# Altium PCB Tag.PcbDoc
Units mm, origin at the board's own origin, x right, y up, seen from the top; angles counter-clockwise.
Board outline 50 x 40 mm, 4 copper layers (Top Layer, Inner Layer L2, Inner Layer L3, Bottom Layer), stack 1.586 mm thick; 65 components, 39 nets, 267 pads, 139 vias.
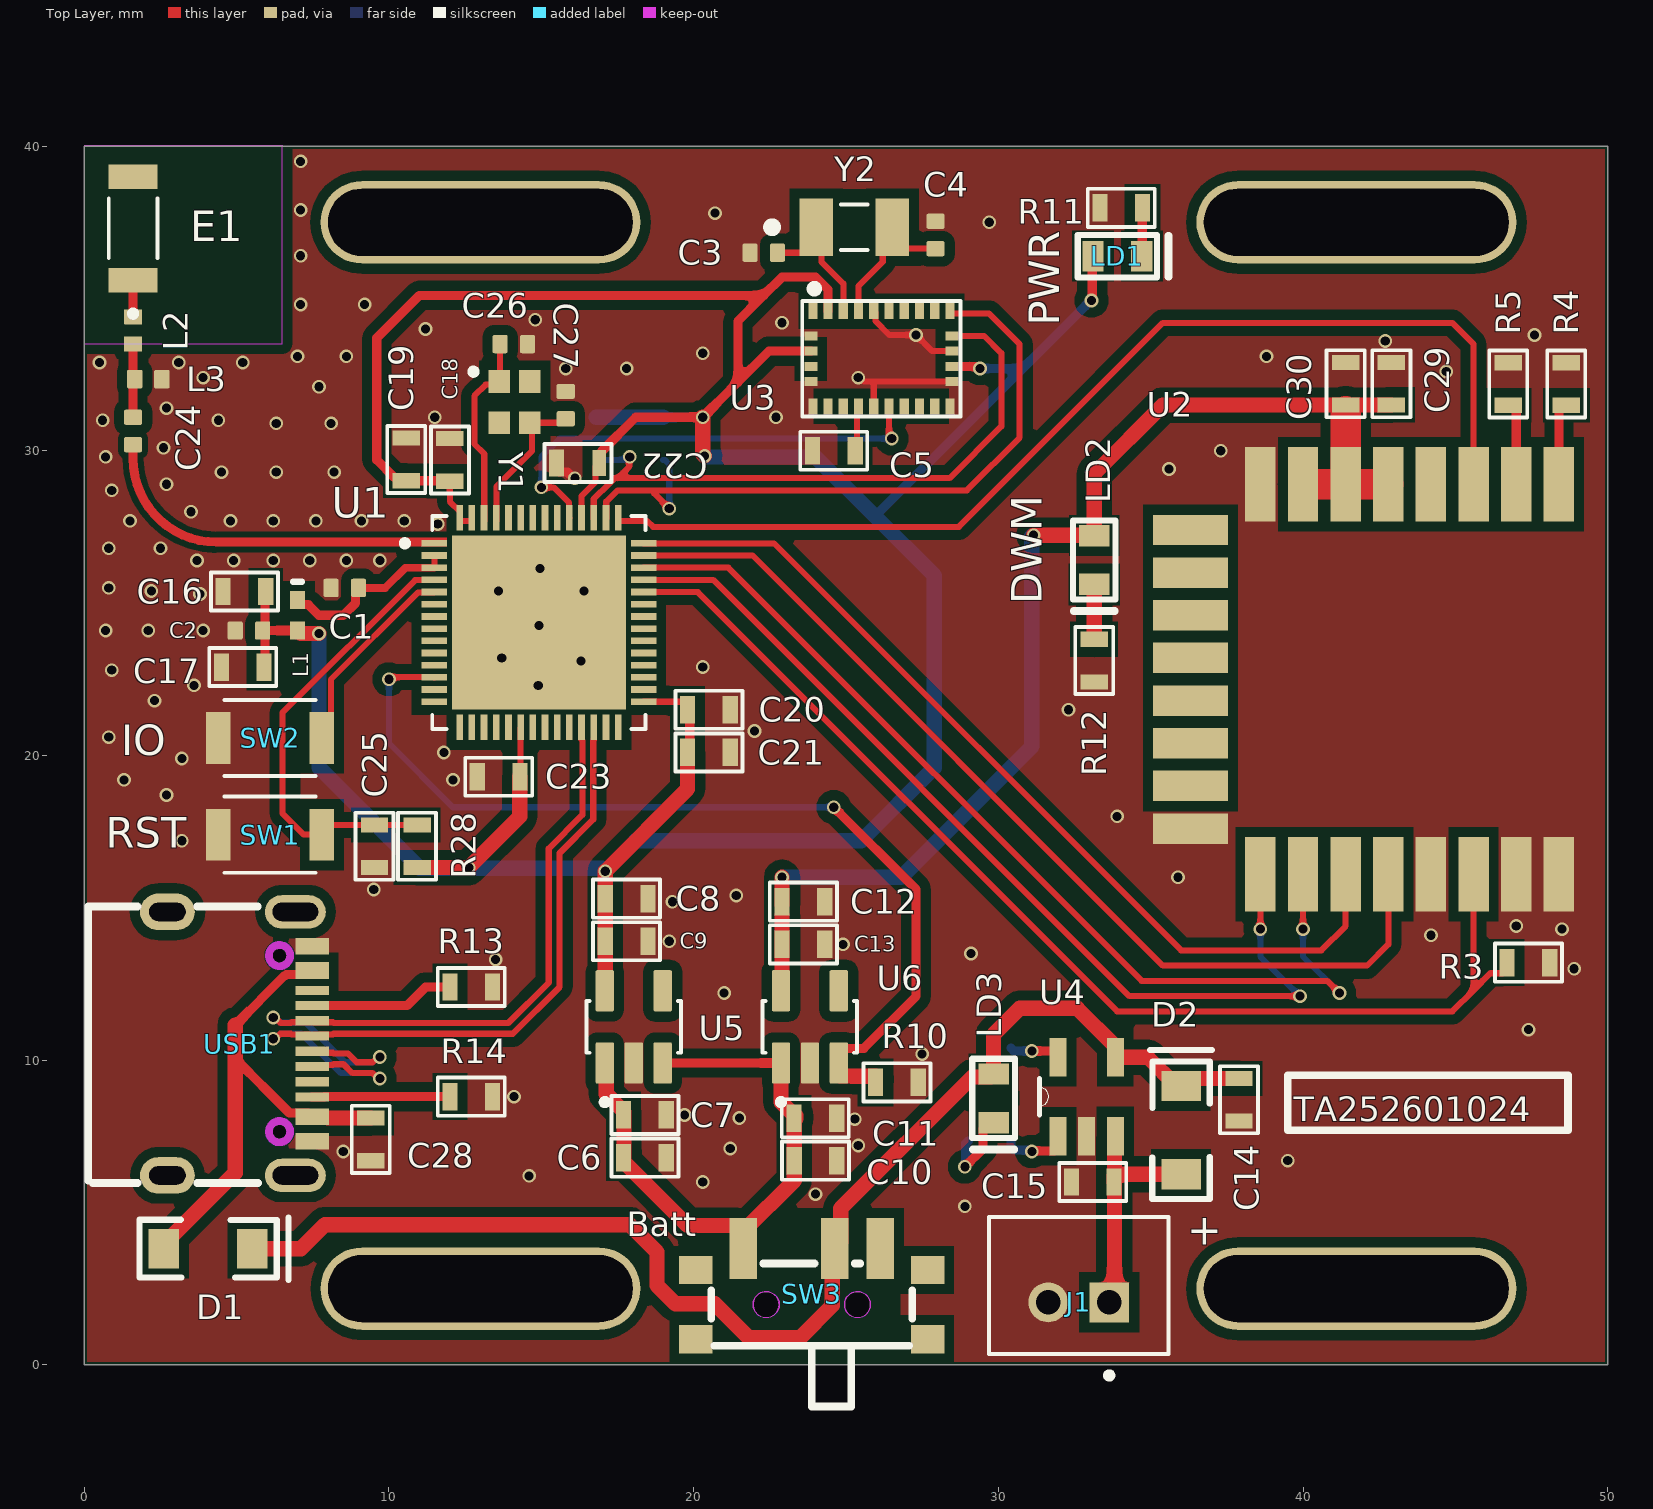
[diagram p0: Top Layer view]
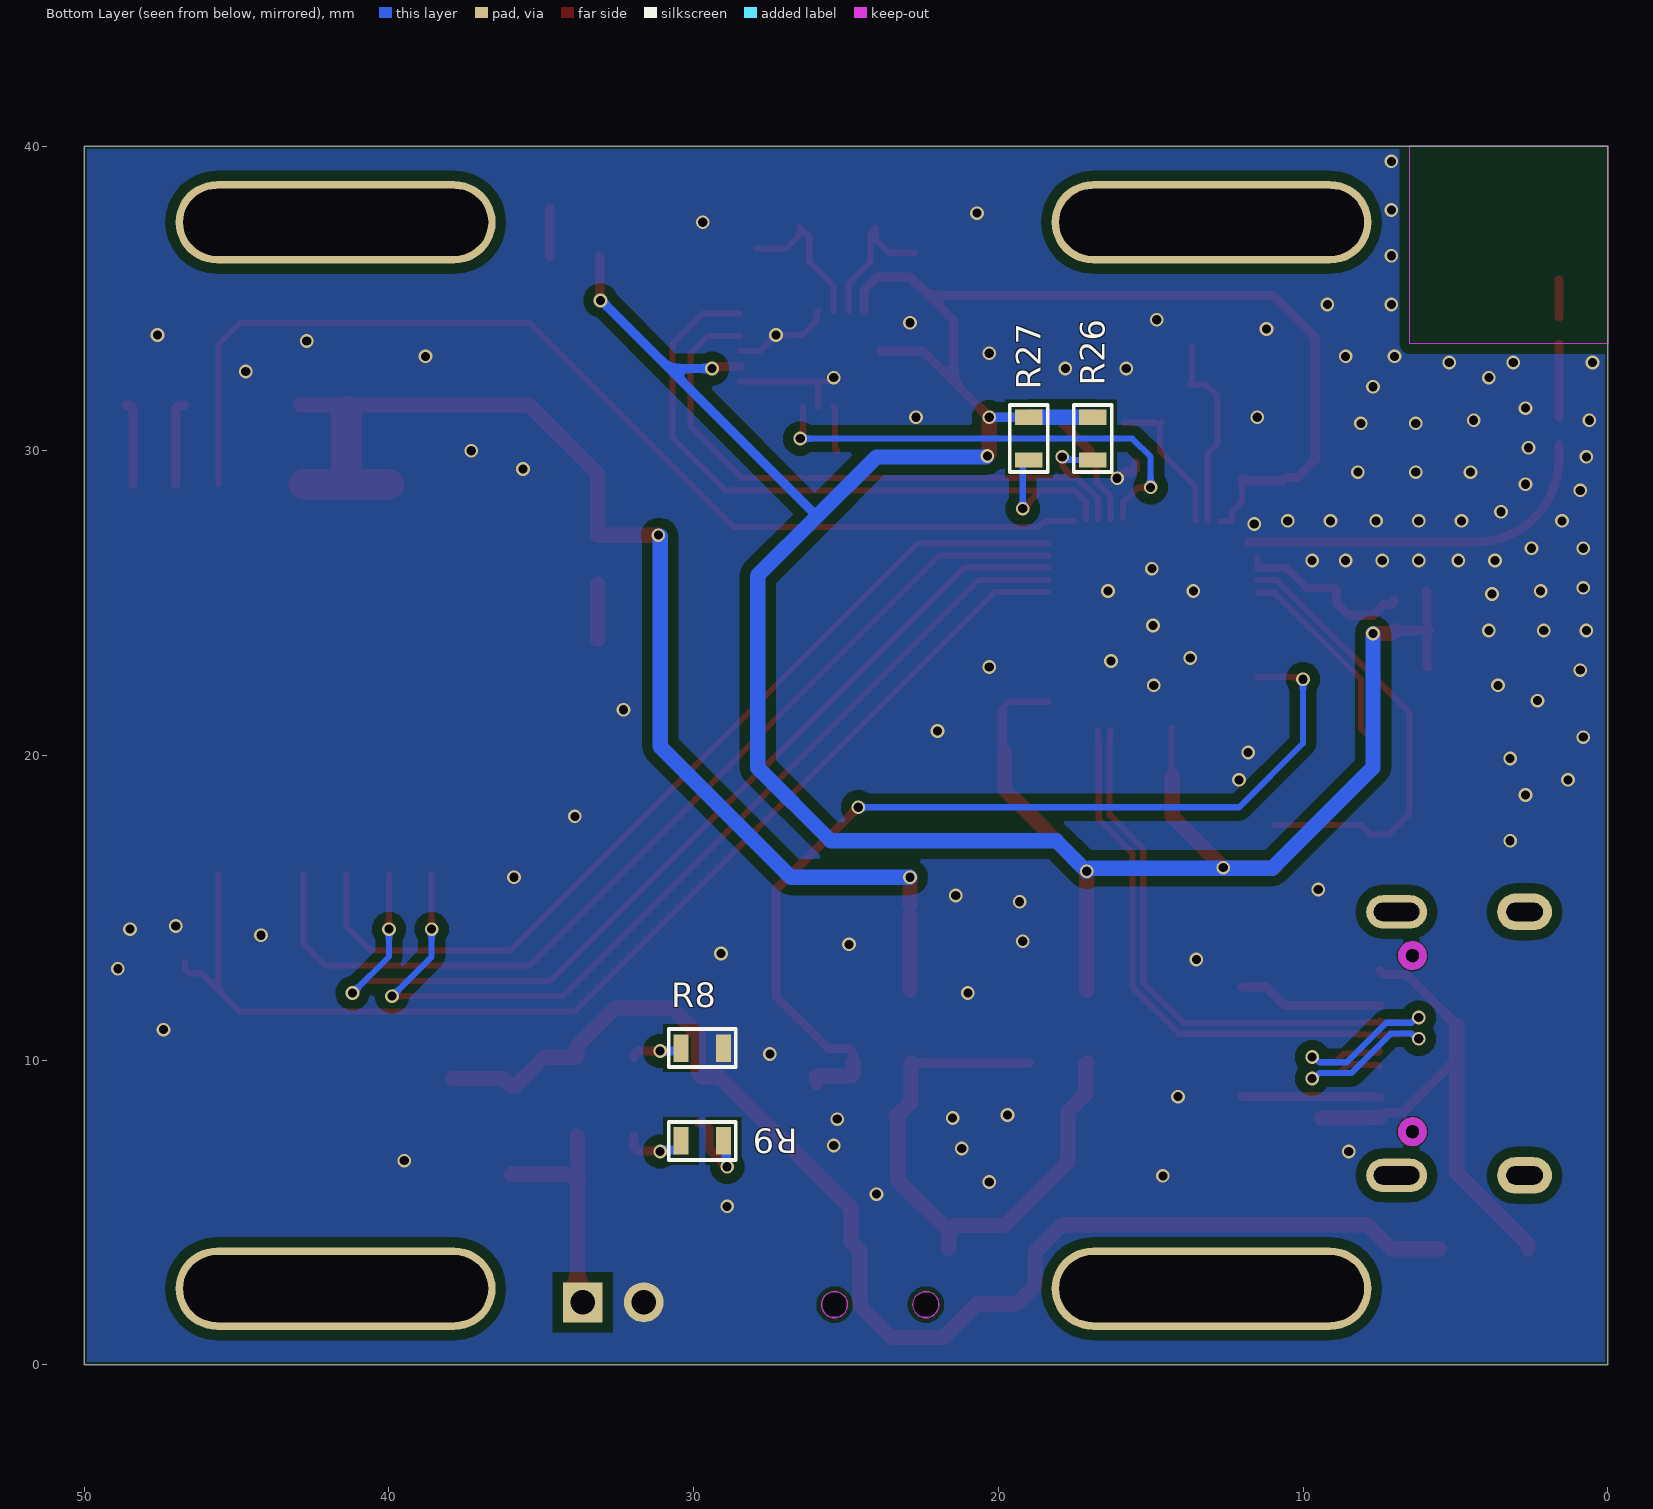
[diagram p1: Bottom Layer view, seen from below]
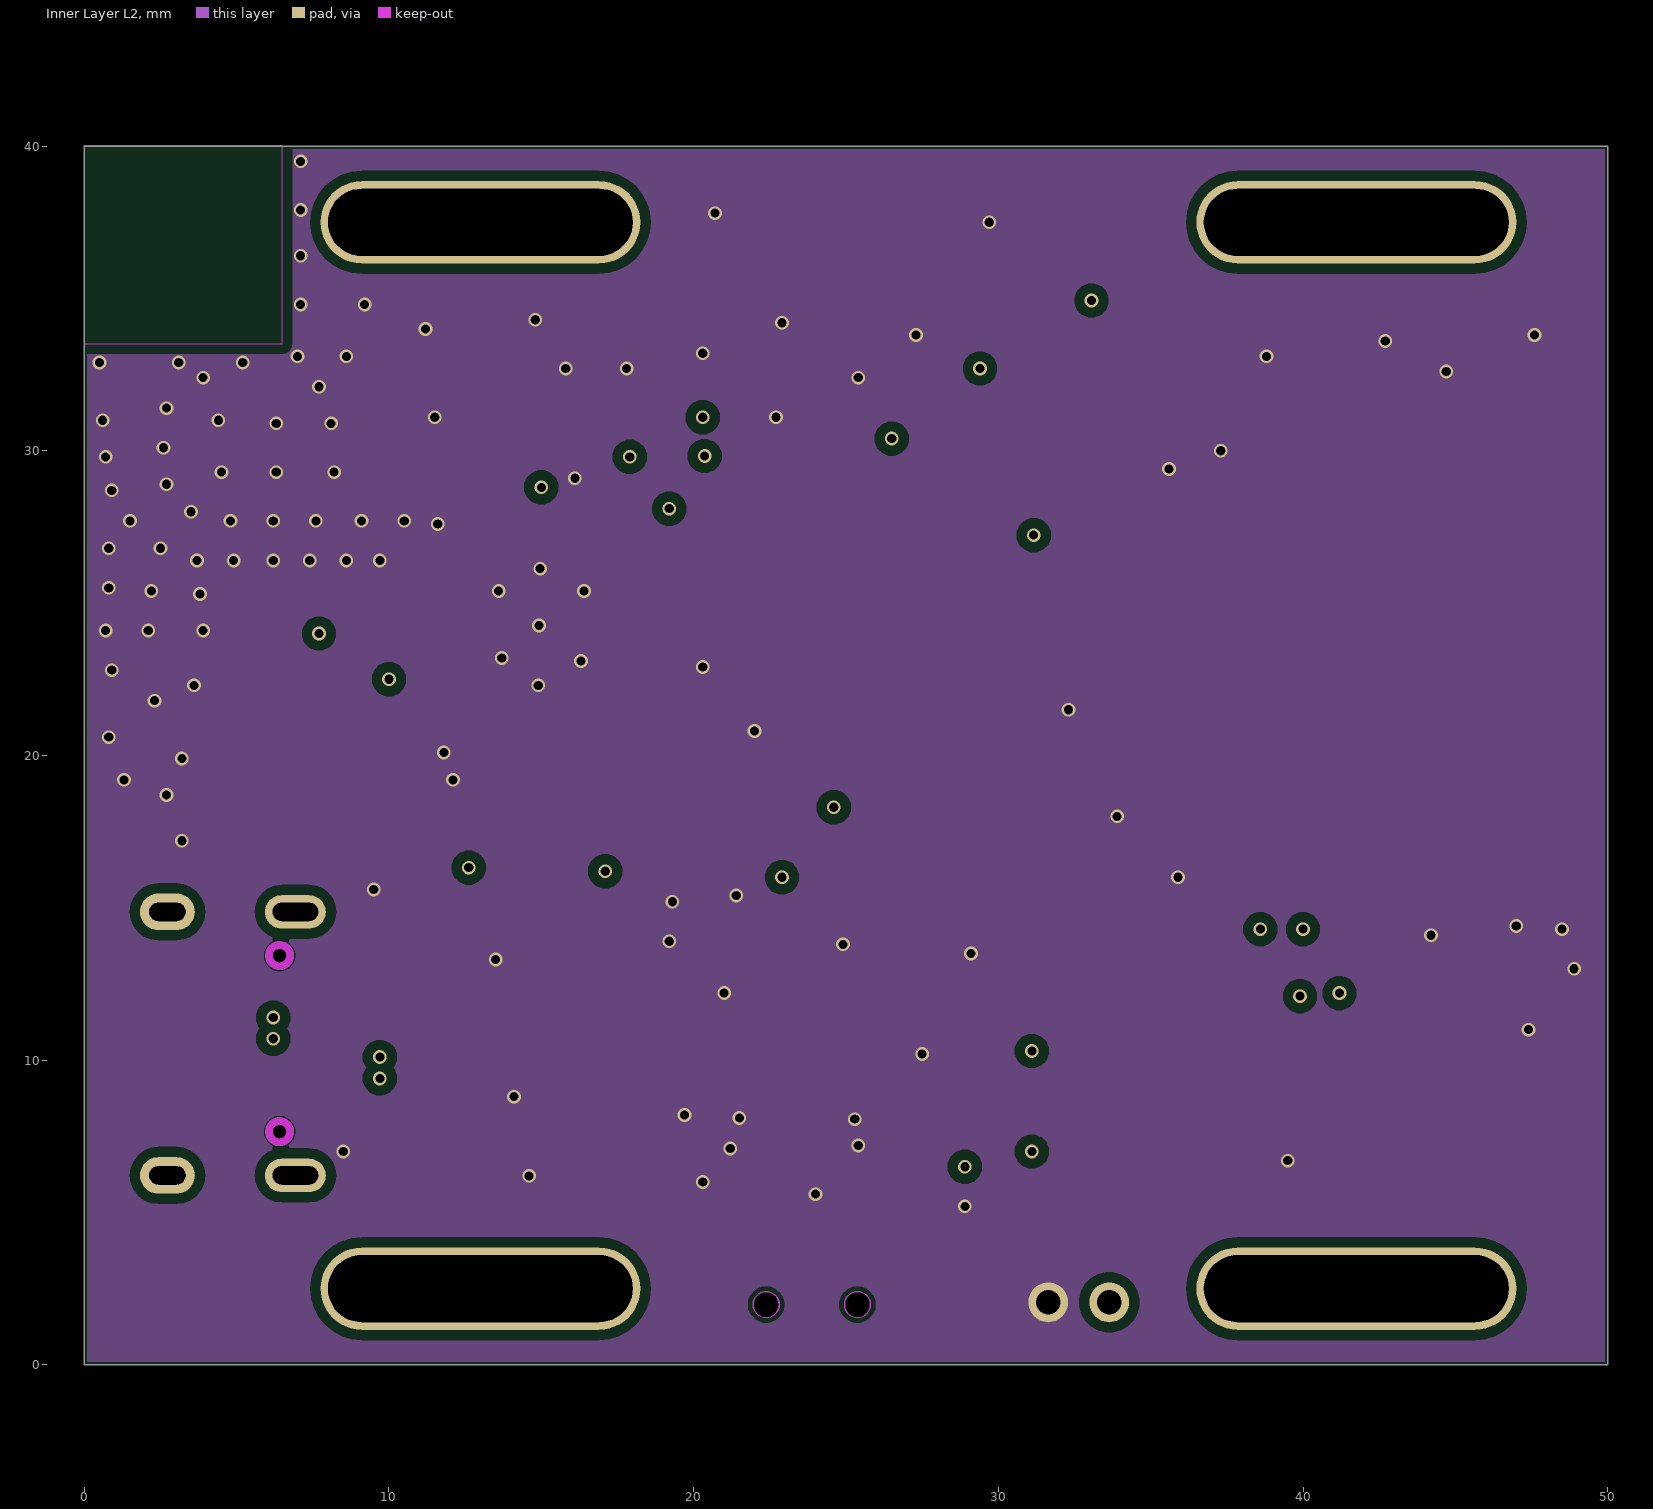
[diagram p2: Inner Layer L2]
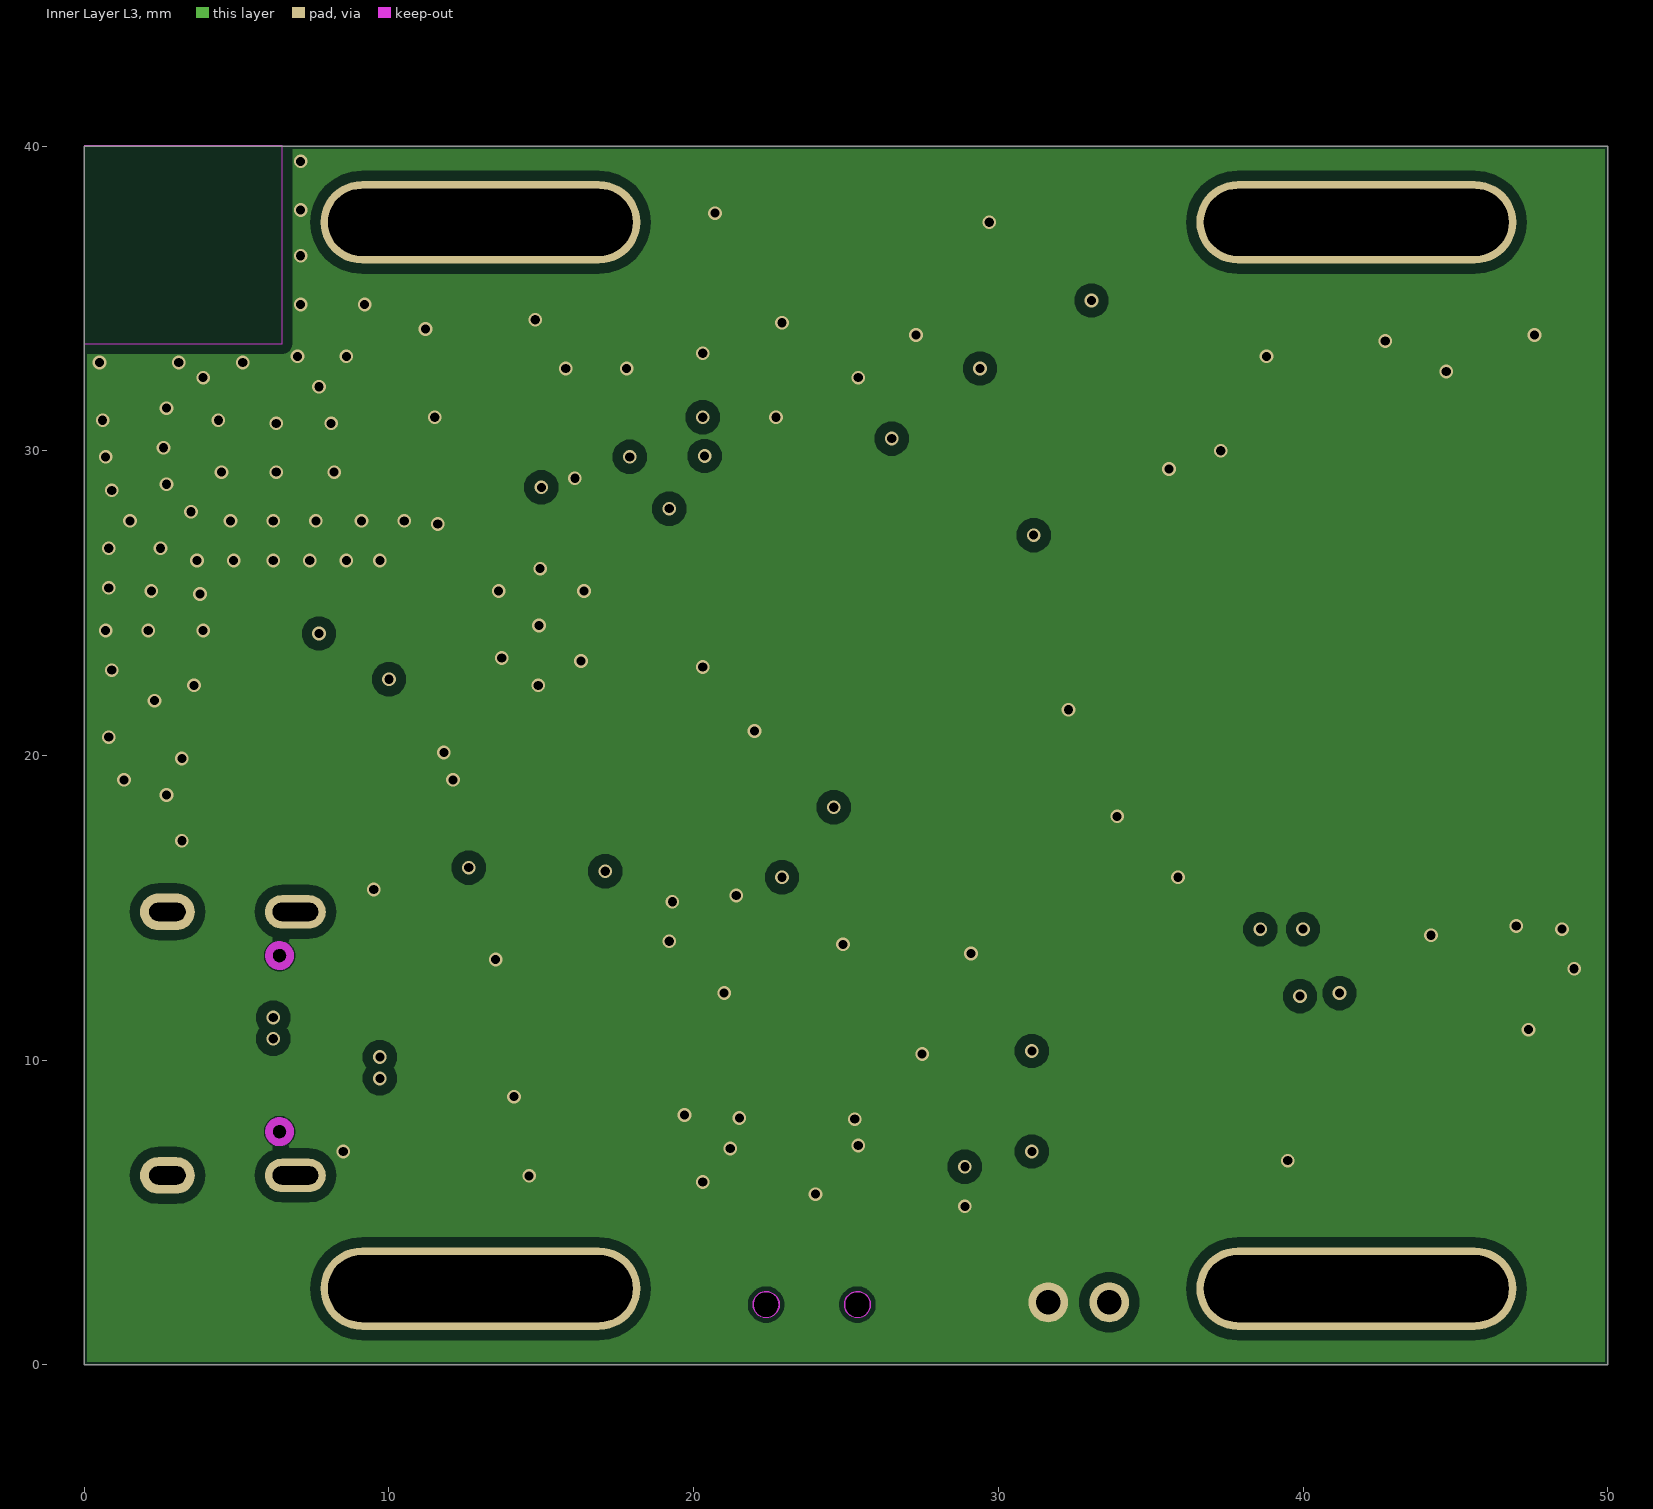
[diagram p3: Inner Layer L3]
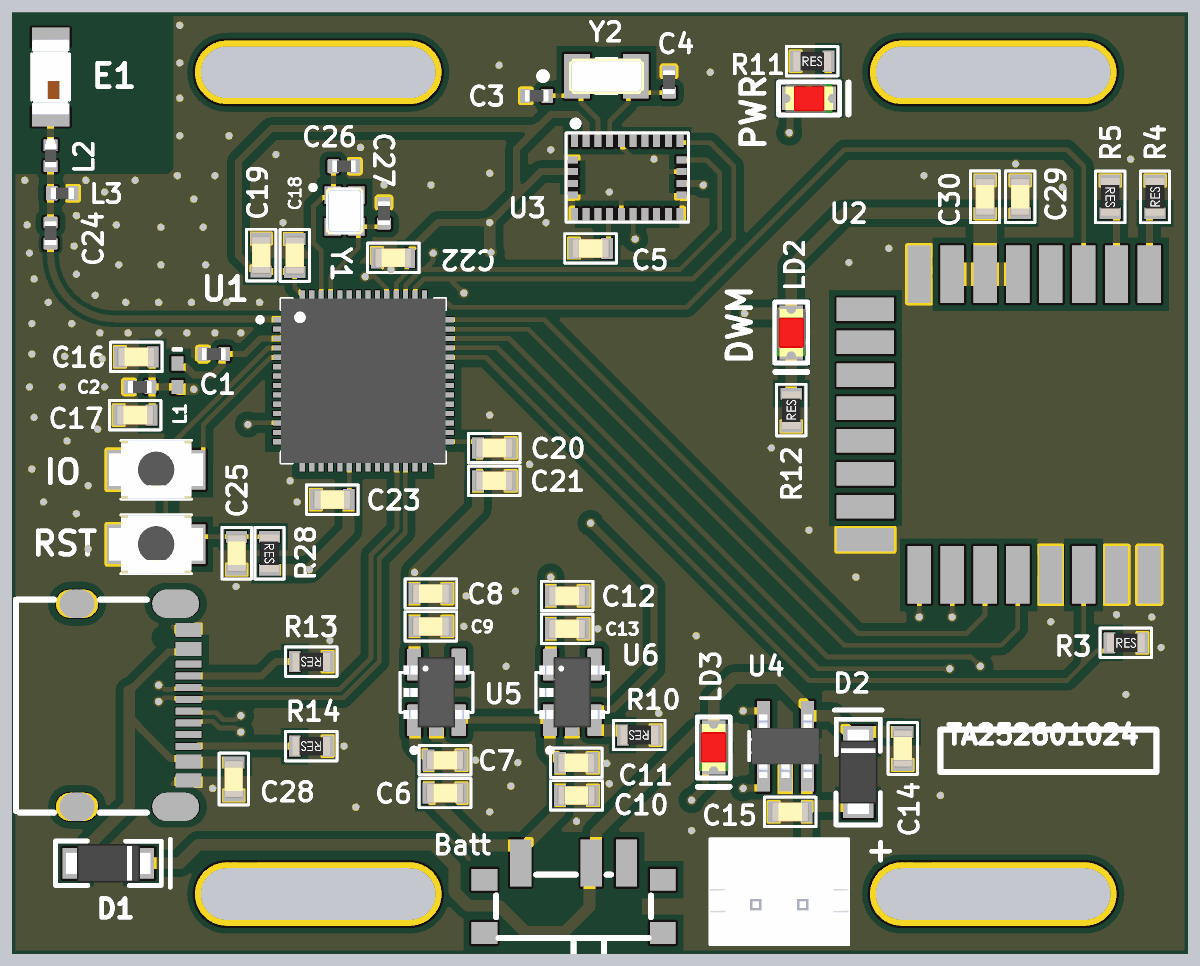
[diagram p4: 3D render of the assembled board from above, using the file's embedded part models]
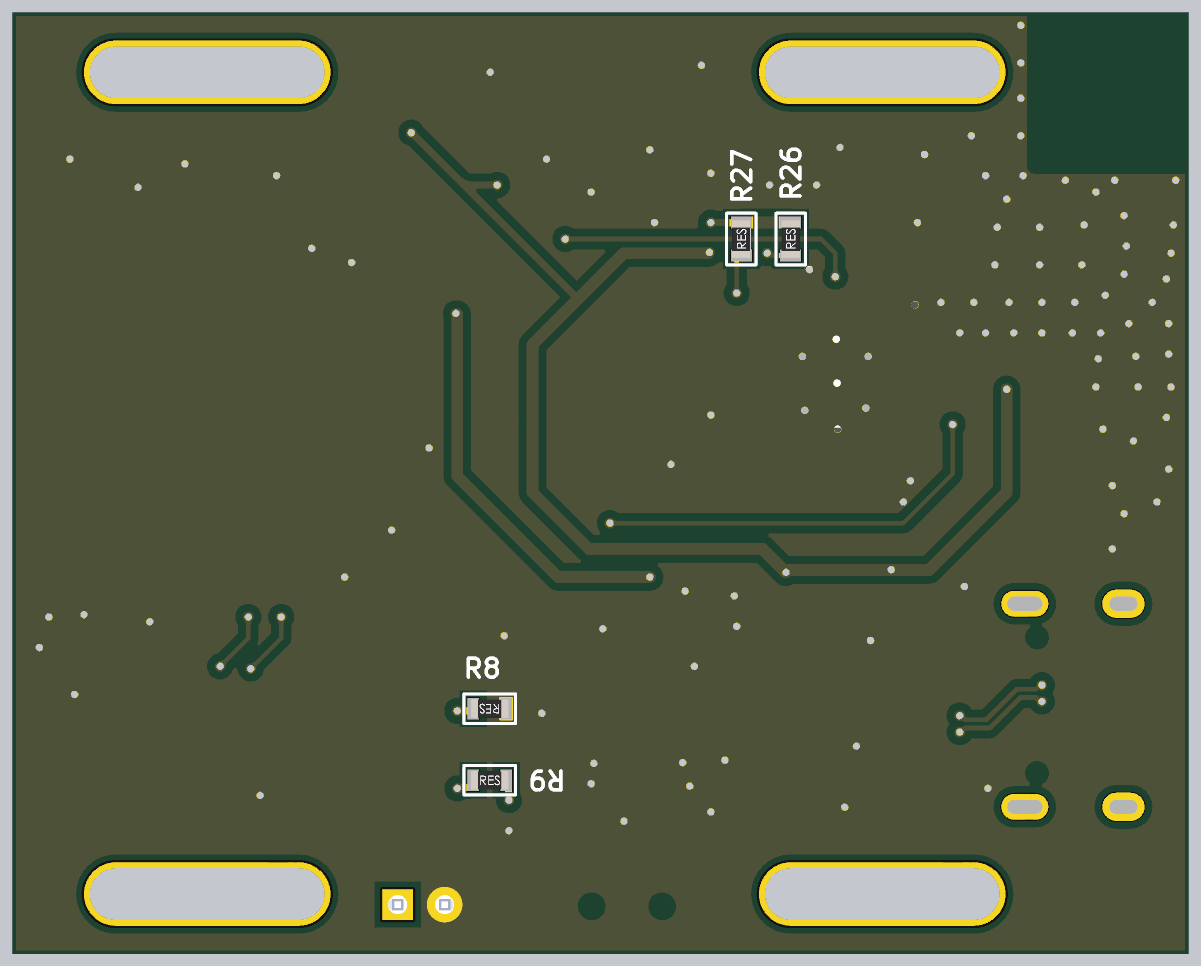
[diagram p5: 3D render of the assembled board from below, using the file's embedded part models]

## Layer stack, top to bottom
Top Solder: solder mask 0.0102, Solder Resist, Dk 3.8
Top Layer: signal copper 0.035
Dielectric 1: prepreg 0.2104, FR-4, Dk 4.4
Inner Layer L2: signal copper 0.0152
Dielectric 3: core 1.065, FR-4, Dk 4.43
Inner Layer L3: signal copper 0.0152
Dielectric 2: prepreg 0.2104, FR-4, Dk 4.4
Bottom Layer: signal copper 0.035
Bottom Solder: solder mask 0.0102, Solder Resist, Dk 3.8

## Board outline
0,0 0,40 50,40 50,0

## Design rules (kind name [scope] priority, off if disabled: settings)
Clearance Clearance_RF [InNet('LNA_IN')] p1: gap=0.152 ignorepadtopadclearanceinfootprint=TRUE except(0: Arc-Hole Track-Hole SMDPad-Hole THPad-Hole Via-Hole Fill-Hole Poly-Hole Region-Hole Text-Hole; 0.2: Arc-Poly Track-Poly SMDPad-Poly THPad-Poly Via-Poly Fill-Poly Poly-Poly; 0.254: Arc-Text Track-Text SMDPad-Text THPad-Text Via-Text Fill-Text Poly-Text Region-Text Text-Text)
Clearance [All] p2: gap=0.152 ignorepadtopadclearanceinfootprint=TRUE except(0: Arc-Hole Track-Hole SMDPad-Hole THPad-Hole Via-Hole Fill-Hole Poly-Hole Region-Hole Text-Hole; 0.254: Arc-Text Track-Text SMDPad-Text THPad-Text Via-Text Fill-Text Poly-Text Region-Text Text-Text; 0.33: Arc-Poly Track-Poly SMDPad-Poly THPad-Poly Via-Poly Fill-Poly Poly-Poly)
DiffPairsRouting DiffPairsRouting_90 [All] p1: maxlimit=0.152 minlimit=0.152 mostfreqgap=0.152 toplayer_minwidth=0.203 toplayer_maxwidth=0.203 toplayer_prefwidth=0.203 midlayer1_minwidth=0.203 midlayer1_maxwidth=0.203 midlayer1_prefwidth=0.203 midlayer2_minwidth=0.203 midlayer2_maxwidth=0.203 midlayer2_prefwidth=0.203 bottomlayer_minwidth=0.203 bottomlayer_maxwidth=0.203 bottomlayer_prefwidth=0.203 maxuncoupledlength=12.7
DiffPairsRouting [All] p2: maxlimit=0.254 minlimit=0.254 mostfreqgap=0.254 toplayer_minwidth=0.381 toplayer_maxwidth=0.381 toplayer_prefwidth=0.381 midlayer1_minwidth=0.381 midlayer1_maxwidth=0.381 midlayer1_prefwidth=0.381 midlayer2_minwidth=0.381 midlayer2_maxwidth=0.381 midlayer2_prefwidth=0.381 bottomlayer_minwidth=0.381 bottomlayer_maxwidth=0.381 bottomlayer_prefwidth=0.381 maxuncoupledlength=12.7
HoleSize [All] p1: absolutevalues=TRUE maxlimit=10 minlimit=0.025 maxpercent=80.000 minpercent=20.000
MinimumSolderMaskSliver [All] p1: minsoldermaskwidth=0.05
PolygonConnect [All] p1: connectstyle=Direct reliefconductorwidth=0.254 reliefentries=4 polygonreliefangle="90 Angle" airgapwidth=0.254
RoutingCorners RoutingCorners_50 [InNet('LNA_IN')] p1: cornerstyle=Round minsetback=1.1 maxsetback=1.1
RoutingCorners [All] p2: cornerstyle=45-Degree minsetback=2.54 maxsetback=2.54
RoutingVias [All] p1: holewidth=0.711 width=1.27 viastyle="Through Hole" minholewidth=0.15 minwidth=0.3 maxholewidth=1 maxwidth=2
SilkToSolderMaskClearance [IsPad] p1: minsilkscreentomaskgap=0.05 clearancetoexposedcopper=TRUE
SolderMaskExpansion [All] p1: expansion=0.102 istentingtop=FALSE
Width Width_RF [InNet('LNA_IN')] p1: maxlimit=0.368 minlimit=0.274 preferedwidth=0.294 toplayer_minwidth=0.294 midlayer1_maxwidth=0.274 midlayer1_prefwidth=0.274 midlayer2_maxwidth=0.274 midlayer2_prefwidth=0.274 bottomlayer_minwidth=0.294 minimp=50.000000 maximp=50.000000 favimp=50.000000
Width [All] p2: maxlimit=2 minlimit=0.16 preferedwidth=0.3
25 further rules are at their usual default settings.

## Classes and differential pairs
component class UWB_IMU: C3 C4 C5 C29 C30 LD2 R3 R4 R5 R12 R26 R27 U2 U3 Y2
component class Power: C6 C7 C8 C9 C10 C11 C12 C13 C14 C15 D2 J1 LD1 LD3 R8 R9 R10 R11 SW3 U4 U5 U6
component class Core: C1 C2 C16 C17 C18 C19 C20 C21 C22 C23 C24 C25 C26 C27 C28 D1 E1 L1 L2 L3 R13 R14 R28 SW1 SW2 U1 USB1 Y1
differential pair USB: +USB_P -USB_N

## Components (designator, comment, footprint, x,y, rotation, side; value= is the part's Value field where it differs from the comment)
C1 "100nF" CAPC1005X55N 8.55,25.5 r0 top
C2 "100nF" CAPC1005X55N 5.4,24.1 r0 top
C3 "22pF" CAPC1005X55N 22.3,36.5 r180 top
C4 "22pF" CAPC1005X55N 27.94,37.084 r90 top
C5 "100nF" 0603C#1 24.6,30 r0 top
C6 "10uF" 0603C#1 18.4,6.8 r180 top
C7 "100nF" 0603C#1 18.4,8.2 r180 top
C8 "10uF" 0603C#1 17.8,15.3 r180 top
C9 "100nF" 0603C#1 17.8,13.9 r180 top
C10 "10uF" 0603C#1 24,6.7 r180 top
C11 "100nF" 0603C#1 23.993,8.091 r180 top
C12 "10uF" 0603C#1 23.6,15.2 r180 top
C13 "100nF" 0603C#1 23.6,13.8 r180 top
C14 "10uF" 0603C#1 37.9,8.7 r90 top
C15 "100nF" 0603C#1 33.1,6 r0 top
C16 "10uF" 0603C#1 5.253,25.381 r0 top
C17 "10uF" 0603C#1 5.2,22.9 r0 top
C18 "100nF" 0603C#1 12,29.7 r270 top
C19 "10uF" 0603C#1 10.568,29.718 r270 top
C20 "100nF" 0603C#1 20.5,21.5 r180 top
C21 "10uF" 0603C#1 20.5,20.1 r180 top
C22 "100nF" 0603C#2 16.2,29.6 r0 top
C23 "100nF" 0603C#1 13.6,19.3 r0 top
C24 "500R07S1R2BV4T" CAPC1005X55N 1.6,30.65 r90 top
C25 "10uF" 0603C#1 9.525,17.018 r90 top
C26 "12pF" CAPC1005X55N 14.097,33.501 r0 top
C27 "12pF" CAPC1005X55N 15.8,31.5 r90 top
C28 "10uF" 0603C#1 9.4,7.4 r90 top
C29 "100nF" 0603C#1 42.9,32.2 r270 top
C30 "10uF" 0603C#1 41.4,32.2 r270 top
D1 "1N5819HW" SOD-123FL 4.064,3.81 r0 top
D2 "1N5819HW" SOD-123FL 36,7.7 r90 top
E1 "2450AT18B100E" XDCR_2450AT18B100E 1.6,37.3 r90 top
J1 "B2B-PH-K-S" JST_B2B-PH-K-S 32.639,2.6 r0 top
L1 "Inductor" 0402-A 7,24.6 r270 top value=2nH
L2 "L-07C3N3SV6T" INDC1005X60N 1.6,33.95 r90 top
L3 "L-07C2N7SV6T" INDC1005X60N 2.1,32.35 r180 top
LD1 "" "0603 LED" 33.909,36.387 r0 top
LD2 "" "0603 LED" 33.147,26.416 r270 top
LD3 "GREEN" "0603 LED" 29.845,8.744 r270 top
R3 "10K" 0603R 47.4,13.2 r0 top
R4 "1K" 0603R 48.641,32.193 r90 top
R5 "1K" 0603R 46.736,32.193 r270 top
R8 "2K" 0603R 29.718,10.395 r0 bottom
R9 "1K" 0603R 29.718,7.347 r180 bottom
R10 "1K" 0603R 26.67,9.271 r180 top
R11 "2K" 0603R 34.036,37.973 r0 top
R12 "2K" 0603R 33.147,23.114 r90 top
R13 "5K1" 0603R 12.7,12.4 r180 top
R14 "5K1" 0603R 12.7,8.8 r180 top
R26 "10K" 0603R 16.9,30.4 r90 bottom
R27 "10K" 0603R 19,30.4 r90 bottom
R28 "10K" 0603R 10.922,17.018 r270 top
SW1 "B3U-1000PM" SW_B3U-1000PM 6.096,17.399 r180 top
SW2 "B3U-1000PM" SW_B3U-1000PM 6.096,20.574 r180 top
SW3 "MK-12C02-G020" SW-SMD_MK-12C02-G020 23.876,2.333 r0 top
U1 "ESP32-S3FH4R2" QFN40P700X700X90-57N 14.921,24.363 r0 top
U2 "DWM1000" XCVR_DWM1000 46.6,22.5 r270 top
U3 "BNO055" LGA28R50P4X10_380X520X100 26.162,33.02 r0 top
U4 "MCP73831T-2ACI/OT" SOT95P280X145-5N 32.9,8.8 r90 top
U5 "AP2112K-3.3TRG1" SOT95P285X140-5N 18.034,11.091 r90 top
U6 "AP2112K-3.3TRG1" SOT95P285X140-5N 23.815,11.091 r90 top
USB1 "TYPE-C 16PIN 2MD(073)" USB-C-SMD_TYPE-C-6PIN-2MD-073 5.102,10.541 r270 top
Y1 "XRCGB40M000F1S1BR0" OSC_XRCGB40M000F1S1BR0 14.124,31.596 r0 top
Y2 "32kHz" XTAL_ECS-.327-6-34RR-TR 25.273,37.338 r0 top

## Footprints (in the part's own frame and the unit in brackets; to place one, negate y for a bottom-side part, rotate by r counter-clockwise, add the part's x,y. Pads: shape width x height; smd on the part's side, far side on the other; paste and mask are expansions set on the pad)
0402-A [mm] "Chip Inductor, Body 1.0x0.5mm, IPC High Density"
  rect 0.6x0.5 smd: 1(-0.5,0) 2(0.5,0)
  silkscreen extent -1.1,-0.15 -1.1,0.15, body extent -0.55,-0.3 0.55,0.3, height 0.55
"0603 LED" [mm]
  rect 0.7x1 smd mask+0.05: 1(0.8,0) 2(-0.8,0)
  silkscreen extent -1.3,-0.7 1.68,0.7, body extent -1.01,-0.63 1.01,0.62, height 1.1
0603C#1 [mm]
  rect 0.5x0.9 smd mask+0.05: 1(-0.7,0) 2(0.7,0)
  silkscreen extent -1.1,-0.63 1.1,0.63, body extent -0.8,-0.41 0.8,0.41, height 0.57
0603C#2 [mm]
  rect 0.5x0.9 smd mask+0.05: 1(-0.7,0)
  rect 0.45x0.85 smd mask+0.05: 2(0.7,0)
  silkscreen extent -1.1,-0.63 1.1,0.63, body extent -0.8,-0.41 0.8,0.41, height 0.57
0603R [mm]
  rect 0.5x0.9 smd mask+0.05: 1(-0.7,0) 2(0.7,0)
  silkscreen extent -1.1,-0.63 1.1,0.63, body extent -0.8,-0.4 0.8,0.4, height 0.3
CAPC1005X55N [mm]
  rrect25% 0.5x0.6 smd: 1(-0.45,0) 2(0.45,0)
  body extent -0.5,-0.25 0.5,0.25, height 0.4
INDC1005X60N [mm]
  rrect14% 0.5x0.6 smd: 1(-0.445,0) 2(0.445,0)
  body extent -0.5,-0.25 0.5,0.25, height 0.6
JST_B2B-PH-K-S [mm]
  rect 1.308x1.308 / inner round 1.308 / far side rect 1.308x1.308 hole 0.8: 1(1,-0.55)
  round 1.308 hole 0.8: 2(-1,-0.55)
  silkscreen extent -2.95,-3.05 2.95,2.25, body extent -2.95,-2.25 2.95,2.25, height 6
LGA28R50P4X10_380X520X100 [mm]
  rect 0.3x0.525 smd: 1(-2.25,1.562) 6(-2.25,-1.562) 7(-1.75,-1.562) 8(-1.25,-1.562) 9(-0.75,-1.562) 10(-0.25,-1.562) 11(0.25,-1.562) 12(0.75,-1.562) 13(1.25,-1.562) 14(1.75,-1.562) 15(2.25,-1.562) 20(2.25,1.562) 21(1.75,1.562) 22(1.25,1.562) 23(0.75,1.562) 24(0.25,1.562) 25(-0.25,1.562) 26(-0.75,1.562) 27(-1.25,1.562) 28(-1.75,1.562)
  rect 0.425x0.3 smd: 2(-2.312,0.75) 3(-2.312,0.25) 4(-2.312,-0.25) 5(-2.312,-0.75) 16(2.312,-0.75) 17(2.312,-0.25) 18(2.312,0.25) 19(2.312,0.75)
  silkscreen extent -2.6,-1.9 2.6,2.4
OSC_XRCGB40M000F1S1BR0 [mm]
  rect 0.7x0.75 smd: 1(-0.5,0.675) 2(-0.5,-0.675) 3(0.5,-0.675) 4(0.5,0.675)
  silkscreen extent -1.45,0.9 -1.25,1.1, body extent -0.8,-1 0.8,1, height 0.7
QFN40P700X700X90-57N [mm]
  rect 0.84x0.22 smd mask+0.05: 1(-3.435,2.6) 2(-3.435,2.2) 3(-3.435,1.8) 4(-3.435,1.4) 5(-3.435,1) 6(-3.435,0.6) 7(-3.435,0.2) 8(-3.435,-0.2) 9(-3.435,-0.6) 10(-3.435,-1) 11(-3.435,-1.4) 12(-3.435,-1.8) 13(-3.435,-2.2) 14(-3.435,-2.6) 29(3.435,-2.6) 30(3.435,-2.2) 31(3.435,-1.8) 32(3.435,-1.4) 33(3.435,-1) 34(3.435,-0.6) 35(3.435,-0.2) 36(3.435,0.2) 37(3.435,0.6) 38(3.435,1) 39(3.435,1.4) 40(3.435,1.8) 41(3.435,2.2) 42(3.435,2.6)
  rect 0.22x0.84 smd mask+0.05: 15(-2.6,-3.435) 16(-2.2,-3.435) 17(-1.8,-3.435) 18(-1.4,-3.435) 19(-1,-3.435) 20(-0.6,-3.435) 21(-0.2,-3.435) 22(0.2,-3.435) 23(0.6,-3.435) 24(1,-3.435) 25(1.4,-3.435) 26(1.8,-3.435) 27(2.2,-3.435) 28(2.6,-3.435) 43(2.6,3.435) 44(2.2,3.435) 45(1.8,3.435) 46(1.4,3.435) 47(1,3.435) 48(0.6,3.435) 49(0.2,3.435) 50(-0.2,3.435) 51(-0.6,3.435) 52(-1,3.435) 53(-1.4,3.435) 54(-1.8,3.435) 55(-2.2,3.435) 56(-2.6,3.435)
  rect 5.7x5.7 smd paste-4 mask+0.05: 57(0,0)
  silkscreen extent -4.5,-3.5 3.5,3.5, body extent -3.5,-3.5 3.5,3.5, height 0.9
SOD-123FL [mm]
  rect 1x1.3 smd: 1(1.45,0) 2(-1.45,0)
  silkscreen extent -2.25,-1.02 2.64,1.02, body extent -1.8,-0.82 1.8,0.83, height 0.95
SOT95P280X145-5N [mil]
  rect 50x22 smd: 1(-51,37) 2(-51,0) 3(-51,-37) 4(51,-37) 5(51,37)
  silkscreen extent -24,49 24,61, body extent -53,-57 53,57, height 57
SOT95P285X140-5N [mm]
  rrect15% 1.35x0.6 smd: 1(-1.185,0.95) 2(-1.185,0) 3(-1.185,-0.95) 4(1.185,-0.95) 5(1.185,0.95)
  silkscreen extent -2.57,-1.55 0.85,1.55, body extent -1.5,-1.4 1.5,1.4, height 1.4
SW-SMD_MK-12C02-G020 [mm]
  rect 0.9x2 smd: 1(-2.25,1.491) 2(0.75,1.491) 3(2.25,1.491)
  rect 1.1x0.93 smd: 4(3.8,0.779) 5(3.8,-1.491) 6(-3.8,-1.491) 7(-3.8,0.779)
  Keep-Out Layer board cut-out: -1.075,-0.356 -1.075,-0.44 -1.14,-0.596 -1.259,-0.716 -1.415,-0.781 -1.585,-0.781 -1.741,-0.716 -1.86,-0.596 -1.925,-0.44 -1.925,-0.356 -1.925,-0.271 -1.86,-0.115 -1.741,0.005 -1.585,0.069 -1.415,0.069 -1.259,0.005 -1.14,-0.115 -1.075,-0.271 -1.075,-0.356 -1.075,-0.356
  Keep-Out Layer board cut-out: 1.925,-0.356 1.925,-0.44 1.86,-0.596 1.741,-0.716 1.585,-0.781 1.415,-0.781 1.259,-0.716 1.14,-0.596 1.075,-0.44 1.075,-0.356 1.075,-0.271 1.14,-0.115 1.259,0.005 1.415,0.069 1.585,0.069 1.741,0.005 1.86,-0.115 1.925,-0.271 1.925,-0.356 1.925,-0.356
  Keep-Out Layer circle w0.025: c-1.5,-0.356 r0.425
  Keep-Out Layer circle w0.025: c1.5,-0.356 r0.425
  Keep-Out Layer region: -1.075,-0.356 -1.075,-0.44 -1.14,-0.596 -1.259,-0.716 -1.415,-0.781 -1.585,-0.781 -1.741,-0.716 -1.86,-0.596 -1.925,-0.44 -1.925,-0.356 -1.925,-0.271 -1.86,-0.115 -1.741,0.005 -1.585,0.069 -1.415,0.069 -1.259,0.005 -1.14,-0.115 -1.075,-0.271 -1.075,-0.356 -1.075,-0.356
  Keep-Out Layer region: 1.925,-0.356 1.925,-0.44 1.86,-0.596 1.741,-0.716 1.585,-0.781 1.415,-0.781 1.259,-0.716 1.14,-0.596 1.075,-0.44 1.075,-0.356 1.075,-0.271 1.14,-0.115 1.259,0.005 1.415,0.069 1.585,0.069 1.741,0.005 1.86,-0.115 1.925,-0.271 1.925,-0.356 1.925,-0.356
  silkscreen extent -3.3,-3.71 3.3,0.99
SW_B3U-1000PM [mm]
  rect 0.8x1.7 smd paste+0 mask+0.102: 1(-1.7,0) 2(1.7,0)
  silkscreen extent -1.5,-1.25 1.5,1.25, body extent -2,-1.25 2,1.25, height 1.75
USB-C-SMD_TYPE-C-6PIN-2MD-073 [mm]
  rect 0.55x1.1 smd paste-100 mask+0.05: 1(-3.2,2.375) 2(-2.4,2.375) 11(2.4,2.375) 12(3.2,2.375)
  rect 0.3x1.1 smd paste-100 mask+0.05: 3(-1.75,2.375) 4(-1.25,2.375) 5(-0.75,2.375) 6(-0.25,2.375) 7(0.25,2.375) 8(0.75,2.375) 9(1.25,2.375) 10(1.75,2.375)
  oval 1.2x1.8 hole 0.6 slot 1.2 at 90 deg paste+0 mask+0.05: 13(-4.325,-2.375) 14(4.325,-2.375)
  oval 1.1x2 hole 0.6 slot 1.5 at 90 deg paste+0 mask+0.05: 13(-4.325,1.825) 14(4.325,1.825)
  Keep-Out Layer board cut-out: 3.24,1.305 3.239,1.374 3.185,1.5 3.086,1.597 2.959,1.649 2.821,1.649 2.694,1.597 2.596,1.5 2.541,1.374 2.54,1.305 2.541,1.236 2.596,1.11 2.694,1.013 2.821,0.961 2.959,0.961 3.086,1.013 3.185,1.11 3.239,1.236 3.24,1.305
  Keep-Out Layer board cut-out: -2.54,1.305 -2.541,1.374 -2.595,1.5 -2.694,1.597 -2.821,1.649 -2.959,1.649 -3.086,1.597 -3.184,1.5 -3.239,1.374 -3.24,1.305 -3.239,1.236 -3.184,1.11 -3.086,1.013 -2.959,0.961 -2.821,0.961 -2.694,1.013 -2.595,1.11 -2.541,1.236 -2.54,1.305
  Keep-Out Layer circle w0.254: c2.89,1.305 r0.35
  Keep-Out Layer circle w0.025: c2.89,1.305 r0.35
  Keep-Out Layer circle w0.254: c-2.89,1.305 r0.35
  Keep-Out Layer circle w0.025: c-2.89,1.305 r0.35
  silkscreen extent -4.5,-4.97 4.57,0.6
XCVR_DWM1000 [mm]
  rect 2.45x1 smd: 1(-6.4,1.8) 2(-6.4,0.4) 3(-6.4,-1) 4(-6.4,-2.4) 5(-6.4,-3.8) 6(-6.4,-5.2) 7(-6.4,-6.6) 8(-6.4,-8) 17(6.4,-8) 18(6.4,-6.6) 19(6.4,-5.2) 20(6.4,-3.8) 21(6.4,-2.4) 22(6.4,-1) 23(6.4,0.4) 24(6.4,1.8)
  rect 1x2.45 smd: 9(-4.9,-10.295) 10(-3.5,-10.295) 11(-2.1,-10.295) 12(-0.7,-10.295) 13(0.7,-10.295) 14(2.1,-10.295) 15(3.5,-10.295) 16(4.9,-10.295)
XDCR_2450AT18B100E [mm]
  rect 0.8x1.6 smd: 1(-1.7,0) 2(1.7,0)
  silkscreen extent -2.9,-0.8 0.98,0.8, body extent -1.6,-0.8 1.6,0.8, height 0.7
XTAL_ECS-.327-6-34RR-TR [mm]
  rect 1.1x1.9 smd: 1(-1.25,0) 2(1.25,0)
  silkscreen extent -2.84,-0.75 0.44,0.75, body extent -1.6,-0.75 1.6,0.75, height 0.9

## Part data
C1 C2 C3 C4 C26 C27: library part 0402N100J500CT, "10 pF Â±5% 50V Ceramic Capacitor C0G, NP0 0402 (1005 Metric)", Package="0402 Walsin Technologies", Check_prices=https://www.snapeda.com/parts/0402N100J500CT/Walsin+Technologies/view-part/?ref=eda, MF="Walsin Technology", MP=0402N100J500CT, SnapEDA_Link=https://www.snapeda.com/parts/0402N100J500CT/Walsin+Technologies/view-part/?ref=snap
C5 C6 C7 C8 C9 C10 C11 C12 C13 C14 C15 C16 C17 C18 C19 C20 C21 C22 C23 C25 C28 C29 C30: library part "Capacitor - non polarized", "Non-polarised capacitor"
C24: "1.2 pF Â±0.1pF 50V Ceramic Capacitor C0G, NP0 0402 (1005 Metric)", Package="0402 Johanson", Check_prices=https://www.snapeda.com/parts/500R07S1R2BV4T/Johanson/view-part/?ref=eda, MF="Johanson Technology", MP=500R07S1R2BV4T, SnapEDA_Link=https://www.snapeda.com/parts/500R07S1R2BV4T/Johanson/view-part/?ref=snap
D1 D2: library part "Diode A1C3", "Diode Anode Pin 1 Cathode Pin 3 (Pas de pin 2)"
E1: "2.4GHz - Chip RF Antenna 2.4GHz ~ 2.5GHz 0.5dBi Solder Surface Mount", Package=None, Availability="In Stock", Check_prices=https://www.snapeda.com/parts/2450AT18B100E/Johanson+Technology+Inc./view-part/?ref=eda, MF="Johanson Technology", MP=2450AT18B100E, Price=None, Purchase-URL=https://pricing.snapeda.com/search/part/2450AT18B100E/?ref=eda, SnapEDA_Link=https://www.snapeda.com/parts/2450AT18B100E/Johanson+Technology+Inc./view-part/?ref=snap
J1: "Connector Header Through Hole 2 position 0.079 (2.00mm)", Package=None, Check_prices=https://www.snapeda.com/parts/B2B-PH-K-S/JST/view-part/?ref=eda, MF="JST Sales America Inc.", MP=B2B-PH-K-S, SnapEDA_Link=https://www.snapeda.com/parts/B2B-PH-K-S/JST/view-part/?ref=snap
L2: "3.3 nH Unshielded Multilayer Inductor 300 mA 190mOhm Max 0402 (1005 Metric)", Package="SMD-2 JOHANSON", Check_prices=https://www.snapeda.com/parts/L-07C3N3SV6T/Johanson/view-part/?ref=eda, MF="Johanson Technology", MP=L-07C3N3SV6T, SnapEDA_Link=https://www.snapeda.com/parts/L-07C3N3SV6T/Johanson/view-part/?ref=snap
L3: library part L-07C3N3SV6T, "3.3 nH Unshielded Multilayer Inductor 300 mA 190mOhm Max 0402 (1005 Metric)", Package="SMD-2 JOHANSON", Check_prices=https://www.snapeda.com/parts/L-07C3N3SV6T/Johanson/view-part/?ref=eda, MF="Johanson Technology", MP=L-07C3N3SV6T, SnapEDA_Link=https://www.snapeda.com/parts/L-07C3N3SV6T/Johanson/view-part/?ref=snap
LD1 LD2: library part "LED Red 1C 2A", "LED Red 1C 2A"
LD3: library part "LED Green 1C 2A", "LED Green 1C 2A"
R3 R4 R5 R8 R9 R10 R11 R12 R13 R14 R26 R27 R28: library part "Resistor - 1%_1", "Resistor - 1%"
SW1 SW2: "Top, w/o Boss 1k Reel", Package="Custom Package Omron", Check_prices=https://www.snapeda.com/parts/B3U-1000PM/Omron/view-part/?ref=eda, MF=Omron, MP=B3U-1000PM, SnapEDA_Link=https://www.snapeda.com/parts/B3U-1000PM/Omron/view-part/?ref=snap
SW3: Actuator Color=Black, Current Rating=1A, JLCPCB Part Class="Extended Part", LCSC Part Name=微型拨动开关, Manufacturer=G-Switch(品赞), Operating Temperature=-20℃~+70℃, Voltage Rating=6V, Actuator Style="Rectangular Columnar", Add into BOM=yes, Circuit=SPDT, Convert to PCB=yes, Datasheet=https://item.szlcsc.com/datasheet/MK-12C02-G020/1046841.html, Device=MK-12C02-G020, Length=6.6mm, Life="10,000 Cycles", Manufacturer Part=MK-12C02-G020, Mounting Type="Surface Mount, Right Angle", Supplier=LCSC, Supplier Footprint=SMD,6.6x1.4mm, Supplier Part=C963206, Switch Height=4.7mm, Symbol=MK-12C02-G020, Termination Style=-, Width=1.4mm
U1: "RF System on a Chip - SoC SMD IC ESP32-S3FH4R2, dual-core MCU, Wi-Fi 2.4G & BLE 5.0 combo, 4 MB flash and 2 MB PSRAM inside, QFN 56-pin, 7*7 mm", Package=None, Check_prices=https://www.snapeda.com/parts/ESP32-S3FH4R2/Espressif+Systems/view-part/?ref=eda, MF="Espressif Systems", MP=ESP32-S3FH4R2, SnapEDA_Link=https://www.snapeda.com/parts/ESP32-S3FH4R2/Espressif+Systems/view-part/?ref=snap
U2: "802.15.4 IR-UWB Transceiver Module 3.5GHz ~ 6.5GHz Integrated, Chip Surface Mount", Package="Module Decawave", Availability=Unavailable, MF="Decawave Limited", MP=DWM1000, Price=None, SnapEDA_Link=https://www.snapeda.com/parts/DWM1000/Decawave%20Limited/view-part/327593/?ref=snap
U3: "BNO055 9-axis Absolute Orientation Sensor ( SiP ) w/Sensors and Sensor Fusion", Package=None, Availability=Unavailable, MP=BNO055, Price=None
U4: "Charger IC Lithium Ion/Polymer SOT-23-5", Package="SOT-23 Microchip", Availability="In Stock", Check_prices=https://www.snapeda.com/parts/MCP73831T-2ACI/OT/Microchip/view-part/?ref=eda, MF=Microchip, MP=MCP73831T-2ACI/OT, Price=None, Purchase-URL=https://pricing.snapeda.com/search/part/MCP73831T-2ACI/OT/?ref=eda, SnapEDA_Link=https://www.snapeda.com/parts/MCP73831T-2ACI/OT/Microchip/view-part/?ref=snap
U5 U6: "Linear Voltage Regulator IC Positive Fixed 1 Output 600mA SOT-25", Package="SOT-753 Diodes Inc.", Availability="In Stock", Check_prices=https://www.snapeda.com/parts/AP2112K-3.3TRG1/Diodes+Inc./view-part/?ref=eda, MF="Diodes Inc.", MP=AP2112K-3.3TRG1, Price=None, Purchase-URL=https://pricing.snapeda.com/search/part/AP2112K-3.3TRG1/?ref=eda, SnapEDA_Link=https://www.snapeda.com/parts/AP2112K-3.3TRG1/Diodes+Inc./view-part/?ref=snap
USB1: JLCPCB Part Class="Extended Part", Manufacturer="SHOU HAN(首韩)", Contributor=LCSC, Manufacturer Part="TYPE-C 16PIN 2MD(073)", spicePre=U, spiceSymbolName="TYPE-C 16PIN 2MD(073)", Supplier=LCSC, Supplier Part=C2765186
Y1: "Crystal 40MHz Â±10ppm (Tol) Â±10ppm (Stability) 8pF 50Ohm 4-Pin CSMD T/R", Package="SMD-4 Murata", Check_prices=https://www.snapeda.com/parts/XRCGB40M000F1S1BR0/Murata/view-part/4980411/?ref=eda, Digi-Key_Part_Number=490-XRCGB40M000F1S1BR0TR-ND, MF="Murata Electronics", MP=XRCGB40M000F1S1BR0, Purchase-URL=https://pricing.snapeda.com/search/part/XRCGB40M000F1S1BR0/?ref=eda, SnapEDA_Link=https://www.snapeda.com/parts/XRCGB40M000F1S1BR0/Murata/view-part/4980411/?ref=snap
Y2: library part ECS-.327-6-34RR-TR, "32.768kHz 20ppm Crystal 6pF 20 kOhm -40C ~ 85C Surface Mount 2-SMD, No Lead 3.2 x 1.5", Package="ECX-34RR-34RR-2 ECS", Check_prices=https://www.snapeda.com/parts/ECS-.327-6-34RR-TR/ECS/view-part/?ref=eda, MF="ECS Inc.", MP=ECS-.327-6-34RR-TR, SnapEDA_Link=https://www.snapeda.com/parts/ECS-.327-6-34RR-TR/ECS/view-part/?ref=snap
L1: Code_IEC=1005, Code_JEITA=0402, LatestRevisionDate=29-May-2009, LatestRevisionNote="IPC-7351 Footprint Added.", PackageDescription="Chip Inductor", PackageReference=0402-A, Published=8-Jun-2000, Publisher="Altium Limited"

## Free pads (board coordinates)
  oval 10.5x2.7 hole 2.2 slot 10 at 0 deg mask+0.102: 13(13,2.5) 13(13,37.5) 13(41.75,2.5) 13(41.75,37.5)

## Via types
v1: diameter 0.45, hole 0.3, Top Layer to Bottom Layer, tented both sides, 139 vias

## Nets (pads, with @x,y where several pads share a name; then routed paths per layer and width w, separated by ;. In a path a pad name is that pad's centre, name@x,y a point inside that pad or via, vN(x,y) a via of type N, cw(c..) or ccw(c..) an arc to the next point about the centre after c; other vN are vias at no path point)
3V3: C2.2 C8.2 C9.2 C16.2 C17.2 C18.2 C19.2 C20.2 C21.2 C22.2 C23.2 L1.2 LD1.2 R26.2 R27.2 R28.2 U1.20 U1.29 U1.46 U1.55 U1.56 U3.3 U3.17 U3.28 U5.5 | length 124.2
  Top Layer w0.2: C18.2@12,29.076 12,28.334 12.326,28.008 12.326,27.698 U1.55@12.726,27.698 ; C23.2 14.321,19.321 U1.20@14.321,20.9 ; U1.46@16.321,27.77 16.321,28.518 16.775,28.972 16.775,29.475 C22.2 ; U1.29 19.65,21.763 19.87,21.543 C20.2@19.87,21.463
  Top Layer w0.3: C2.2 C2.2@5.926,24.1 ; C17.2 5.926,22.926 C2.2@5.926,24.1 ; C16.2 5.926,25.355 C2.2@5.926,24.1 ; L1.2 C2.2@5.926,24.1 ; C18.2@12,29.076 11.95,29.076 11.892,29.018 10.668,29.018 10.568,29.118 10.182,29.118 9.6,29.7 9.6,33.7 11,35.1 22.3,35.1 ; C22.2 16.975,29.675 16.975,29.975 18.1,31.1 v1(20.3,31.1) 21.45,32.25 ; C20.2@19.87,21.463 19.872,21.461 C21.2@19.872,20.068 ; U3.3 22.47,33.27 21.45,32.25 ; U3.28 24.412,35.288 24,35.7 22.9,35.7 22.3,35.1 ; U3.17 29.289,32.77 29.359,32.7 v1(29.4,32.7) ; v1(33.06,34.931) 33.084,34.955 33.084,36.362 LD1.2 ; 21.45,32.25 21.45,34.25 22.3,35.1
  Top Layer w0.5: L1.2 7,24.05 7.05,24.05 7.1,24 v1(7.7,24) ; R28.2 v1(12.618,16.318) 14.293,17.993 C23.2@14.293,19.304 ; U5.5@17.1,12.292 C8.2 ; C8.2@17.1,15.2 v1(17.1,16.2) 19.8,18.9 C21.2 ; v1(20.3,31.1) 20.3,29.891 v1(20.36,29.831)
  Bottom Layer w0.3: R27.2 v1(20.3,31.1) ; 25.9,27.9 26,27.9 30.8,32.7 ; v1(29.4,32.7) 30.8,32.7 ; v1@33.1,35 30.8,32.7
  Bottom Layer w0.5: v1(7.7,24) 7.7,19.6 11,16.3 17,16.3 v1(17.1,16.2) 18.1,17.2 25.5,17.2 27.9,19.6 27.9,25.9 25.9,27.9 24,29.8 v1@20.4,29.8 ; R26.2@16.8,31.1 R27.2
3V3_DWM: C12.2 C13.2 C29.2 C30.2 LD2.2 U2.5 U2.6 U2.7 U6.5 | length 40.2
  Top Layer w0.5: U6.5@22.9,12.311 22.9,14.749 ; C12.2@22.9,15.1 v1(22.9,16) ; v1(31.16,27.231) 33.132,27.231 LD2.2 33.147,29.247 35.4,31.5 C30.2@41.65,31.5 ; C30.2@41.6,31.5 42.7,31.5 C29.2
  Top Layer w1: U2.7 U2.6 ; C30.2@41.4,31.3 U2.6 ; U2.5 U2.6
  Bottom Layer w0.5: v1(22.9,16) 26.8,16 31.1,20.3 v1@31.1,27.2
5V: C14.2 D1.1 D2.1 LD3.2 SW3.2 U4.4 | length 43.2
  Top Layer w0.5: D1.1 7.11,3.81 7.9,4.6 17.9,4.6 18.8,3.7 18.8,2.6 19.4,2 20.7,2 21.8,0.9 23.5,0.9 24.549,1.949 24.549,3.746 SW3.2 24.826,4.023 24.826,5.126 29.144,9.444 29.745,9.444 LD3.2 29.845,10.845 30.7,11.7 32.591,11.7 33.84,10.451 U4.4 34.905,10.095 35.85,9.15 D2.1 36.25,9.4 C14.2
5V_SW: C6.2 C7.2 C10.2 C11.2 SW3.1 U5.1 U5.3 U6.1 | length 19.3
  Top Layer w0.3: U5.3 U6.1
  Top Layer w0.5: U5.1 17.134,9.856 17.134,8.882 17.711,8.305 17.711,8.255 17.711,7.062 17.715,7.058 17.715,6.858 17.715,6.658 19.8,4.573 21.426,4.573 SW3.1@21.626,4.373 ; SW3.1 SW3.1@21.626,4.373 ; U6.1 22.865,8.62 23.307,8.178 23.357,8.178 23.357,8.128 23.357,8.078 23.303,8.024 23.303,6.731 23.303,6.05 SW3.1@21.626,4.373
GND: C1.1 C2.1 C3.2 C4.2 C5.1 C6.1 C7.1 C8.1 C9.1 C10.1 C11.1 C12.1 C13.1 C14.1 C15.1 C16.1 C17.1 C18.1 C19.1 C20.1 C21.1 C22.1 C23.1 C25.1 C26.2 C27.2 C28.1 C29.1 C30.1 J1.2 L3.1 R3.2 R4.2 R5.1 R8.1 R10.1 R11.1 R12.1 R13.1 R14.1 SW1.2 SW2.2 U1.57 U2.8 U2.16 U2.21 U2.23 U2.24 U3.2 U3.5 U3.6 U3.10 U3.15 U3.16 U3.18 U3.25 U4.2 U5.2 U6.2 USB1.1 USB1.12 | length 8.2
  Top Layer w0.2: v1(25.4,32.4) 25.468,32.4 25.598,32.27 25.825,32.27 ; U3.10 25.912,32.183 25.825,32.27 ; U3.25 25.962,34.532 25.962,34.264 26.426,33.8 v1(27.3,33.8) 27.83,33.27 U3.18 ; U3.16 25.825,32.27
  Top Layer w0.3: C22.1 15.5,29.4 15.6,29.3 15.859,29.3 16.059,29.1 v1(16.1,29.1)
  other v1: 28.9,5.2 24,5.6 20.3,6 14.6,6.2 39.5,6.7 8.5,7 21.2,7.1 25.4,7.2 25.286,8.063 21.5,8.1 19.7,8.2 14.1,8.8 27.5,10.2 47.4,11 21,12.2 48.9,13 13.5,13.3 29.1,13.5 24.9,13.8 19.2,13.9 44.2,14.1 48.5,14.3 47,14.4 19.3,15.2 21.4,15.4 9.5,15.6 35.9,16 3.2,17.2 33.9,18 2.7,18.7 1.3,19.2 12.1,19.2 3.2,19.9 11.8,20.1 0.8,20.6 22,20.8 32.3,21.5 2.3,21.8 3.6,22.3 14.9,22.3 0.9,22.8 20.3,22.9 16.3,23.1 13.7,23.2 0.7,24.1 2.1,24.1 3.9,24.1 14.926,24.263 3.8,25.3 2.2,25.4 13.6,25.4 16.4,25.4 0.8,25.5 14.96,26.131 3.7,26.4 4.9,26.4 6.2,26.4 7.4,26.4 8.6,26.4 9.7,26.4 0.8,26.8 2.5,26.8 11.6,27.6 1.5,27.7 4.8,27.7 6.2,27.7 7.6,27.7 9.1,27.7 10.5,27.7 3.5,28 0.9,28.7 2.7,28.9 4.5,29.3 6.3,29.3 8.2,29.3 35.6,29.4 0.7,29.8 37.3,30 2.6,30.1 6.3,30.9 8.1,30.9 0.6,31 4.4,31 11.5,31.1 22.7,31.1 2.7,31.4 7.7,32.1 3.9,32.4 44.7,32.6 15.8,32.7 17.8,32.7 0.5,32.9 3.1,32.9 5.2,32.9 7,33.1 8.6,33.1 38.8,33.1 20.3,33.2 42.7,33.6 47.6,33.8 11.2,34 22.9,34.2 14.8,34.3 7.1,34.8 9.2,34.8 7.1,36.4 29.7,37.5 20.7,37.8 7.1,37.9 7.1,39.5
LNA_IN: C24.1 U1.1 | length 11.9
  Top Layer w0.294: C24.1 1.6,29.74 ccw(c4.34,29.74) 4.34,27 U1.1@11.486,27
NetC1_2: C1.2 L1.1 U1.2 U1.3 | length 5.8
  Top Layer w0.2: U1.3@11.491,26.252 U1.2@11.491,26.463
  Top Layer w0.254: C1.2 9.881,25.5 10.544,26.163 U1.3
  Top Layer w0.3: L1.1 7,25.05 7.1,24.95 7.35,24.95 7.7,24.6 8.5,24.6 8.9,25 8.9,25.4 C1.2
NetC3_1: C3.1 U3.27 Y2.1 | length 5
  Top Layer w0.2: C3.1 23.573,36.5 24.023,36.95 Y2.1 24.195,37.166 24.195,36.205 24.912,35.488 U3.27
NetC4_1: C4.1 U3.26 Y2.2 | length 5.1
  Top Layer w0.2: U3.26 25.412,35.412 26.205,36.205 26.205,37.02 Y2.2 26.523,37.084 26.973,36.634 C4.1
NetC5_2: C5.2 U3.9 | length 1.5
  Top Layer w0.2: C5.2 25.362,30.062 25.362,31.408 U3.9
NetC24_2: C24.2 L2.1 L3.2 | length 2.4
  Top Layer w0.294: C24.2 L2.1
NetC25_2: C25.2 R28.1 SW1.1 U1.4 | length 14.9
  Top Layer w0.2: R28.1 C25.2 8.096,17.718 7.796,17.418 SW1.1 7.201,17.399 6.5,18.1 6.5,21.4 10.856,25.756 U1.4@11.486,25.756
NetC26_1: C26.1 U1.54 Y1.1 | length 6.6
  Top Layer w0.2: U1.54@13.126,27.698 13.126,29.896 12.8,30.222 12.8,31.8 13.171,32.171 13.647,32.171 13.724,32.171 13.647,32.248 C26.1@13.647,33.401
NetC27_1: C27.1 U1.53 Y1.3 | length 5
  Top Layer w0.2: U1.53@13.526,27.698 13.526,28.826 14.7,30 14.7,30.845 Y1.3 ; Y1.3@14.7,30.797 14.724,30.821 14.822,30.919 C27.1@15.875,30.919
NetC28_2: C28.2 D1.2 USB1.2 USB1.11 | length 16.9
  Top Layer w0.3: 4.9,10.1 6.734,8.266 7.352,8.266 USB1.11 ; 4.95,11.15 6.582,12.782 6.598,12.782 6.637,12.816 7.352,12.816 USB1.2
  Top Layer w0.5: D1.2 2.614,3.96 4.95,6.296 4.95,11.15 ; USB1.11 7.502,8.116 7.973,8.116 7.989,8.1 C28.2
NetE1_1: E1.1 L2.2 | length 1.2
  Top Layer w0.294: L2.2 E1.1
NetLD1_1: LD1.1 R11.2 | length 1.6
  Top Layer w0.3: LD1.1 34.722,36.4 34.722,37.959 R11.2
NetLD2_1: LD2.1 R12.2 | length 1.8
  Top Layer w0.5: R12.2 LD2.1
NetLD3_1: LD3.1 R9.2 | length 2.8
  Top Layer w0.3: v1(28.9,6.5) 29.495,7.095 29.495,7.744 29.695,7.944 LD3.1
  Bottom Layer w0.3: v1(28.9,6.5) 28.929,6.529 28.929,7.258 R9.2
NetR3_1: R3.1 U1.38 U2.22 | length 38.6
  Top Layer w0.2: U1.38 20.137,25.363 33.9,11.6 44.9,11.6 45.6,12.3 ; U2.22 45.6,12.3 ; R3.1 46.7,13 46.55,12.85 46.15,12.85 45.6,12.3
NetR4_1: R4.1 U2.1 | length 2.8
  Top Layer w0.3: U2.1 48.4,31.393 48.5,31.493 R4.1
NetR5_2: R5.2 U2.2 | length 2.8
  Top Layer w0.3: R5.2 46.9,31.493 47,31.393 U2.2
NetR8_2: R8.2 U4.5 | length 1.7
  Top Layer w0.3: v1(31.1,10.3) 31.831,10.3 31.96,10.171 U4.5
  Bottom Layer w0.3: R8.2 30.513,10.3 v1(31.1,10.3)
NetR9_1: R9.1 U4.1 | length 2.2
  Top Layer w0.3: v1(31.1,7) 31.12,7.02 31.831,7.02 31.96,7.149 U4.1
  Bottom Layer w0.3: R9.1 30.418,7.147 30.518,7.047 31.012,7.047 31.059,7 v1(31.1,7)
NetR10_2: R10.2 U1.12 U6.3 | length 31.9
  Top Layer w0.2: v1(10,22.5) 10.068,22.5 10.141,22.573 11.476,22.573 U1.12
  Top Layer w0.3: v1(24.6,18.3) 27.3,15.6 27.3,12.1 25.586,10.386 24.915,10.386 24.765,10.236 U6.3
  Top Layer w0.5: U6.3 24.765,9.531 24.815,9.481 25.19,9.481 25.2,9.471 25.97,9.471 R10.2
  Bottom Layer w0.2: v1(10,22.5) 10,20.4 12.1,18.3 v1(24.6,18.3)
NetR13_2: R13.2 USB1.4 | length 4.8
  Top Layer w0.3: USB1.4 10.591,11.791 11.2,12.4 R13.2
NetR14_2: R14.2 USB1.10 | length 4.5
  Top Layer w0.3: USB1.10 7.877,8.791 7.886,8.8 R14.2
NetR26_1: R26.1 U1.45 U3.19 | length 21.3
  Top Layer w0.2: U1.45@16.721,27.77 16.721,28.419 17.225,28.923 17.229,28.923 17.406,29.1 17.51,29.1 ; v1(17.9,29.8) 17.884,29.784 17.884,29.474 17.51,29.1 ; U3.19 29.53,33.77 30.1,33.2 30.1,30.8 28.4,29.1 17.51,29.1
  Bottom Layer w0.2: R26.1@16.8,29.7 17.732,29.7 17.832,29.8 v1(17.9,29.8)
NetR27_1: R27.1 U1.44 U3.20 | length 23.1
  Top Layer w0.2: U1.44@17.121,27.77 17.131,27.78 17.131,28.331 17.371,28.571 17.375,28.571 17.504,28.7 18.7,28.7 28.966,28.7 30.7,30.434 30.7,33.5 29.7,34.5 U3.20@28.5,34.5 ; 18.7,28.6 v1(19.2,28.1)
  Bottom Layer w0.2: R27.1 19.05,29.7 19.2,29.55 v1(19.2,28.1)
NetSW2_1: SW2.1 U1.5 | length 6.6
  Top Layer w0.2: SW2.1 8.096,20.874 8.096,22.496 10.953,25.353 11.476,25.353 U1.5
NetU1_39: U1.39 U2.17 | length 31.7
  Top Layer w0.2: U1.39 20.637,25.763 34.3,12.1 v1(39.9,12.1) ; v1(38.6,14.3) U2.17
  Bottom Layer w0.2: v1(38.6,14.3) 38.6,13.4 v1(39.9,12.1)
NetU1_40: U1.40 U2.18 | length 33
  Top Layer w0.2: U1.40 21.137,26.163 34.7,12.6 40.8,12.6 v1(41.2,12.2) ; v1(40,14.3) U2.18
  Bottom Layer w0.2: v1(40,14.3) 40,13.4 v1(41.2,12.2)
NetU1_41: U1.41 U2.20 | length 32.6
  Top Layer w0.2: U1.41 21.937,26.563 35.4,13.1 42.1,13.1 42.8,13.8 U2.20
NetU1_42: U1.42 U2.19 | length 30.6
  Top Layer w0.2: U1.42 22.637,26.963 36,13.6 40.6,13.6 41.4,14.4 U2.19
NetU1_43: U1.43 U2.3 | length 35.8
  Top Layer w0.2: U1.43@17.526,27.698 18.469,27.698 18.667,27.5 28.7,27.5 35.4,34.2 44.9,34.2 45.6,33.5 U2.3
NetU1_47: U1.47 U3.11 | length 15.5
  Top Layer w0.2: v1(15,28.8) 15.405,28.8 15.911,28.294 15.911,27.808 U1.47 ; U3.11 26.412,30.556 26.5,30.468 v1(26.5,30.4)
  Bottom Layer w0.2: v1(15,28.8) 15,29.8 15.6,30.4 v1(26.5,30.4)
USB_N: U1.25 USB1.5 USB1.7 | length 25.1
  Top Layer w0.203: v1(6.2,11.4) 6.267,11.4 6.448,11.218 6.774,11.218 6.798,11.242 7.428,11.242 USB1.5 7.525,11.242 8.156,11.242 8.18,11.218 13.916,11.218 15.245,12.547 15.245,16.945 16.348,18.049 16.348,20.495 16.326,20.518 U1.25@16.326,20.828 ; USB1.7 7.525,10.242 8.156,10.242 8.18,10.219 8.653,10.219 8.944,9.928 9.461,9.928 9.633,10.1 v1(9.7,10.1)
  Bottom Layer w0.203: v1(6.2,11.4) 6.267,11.4 6.439,11.228 7.27,11.228 8.57,9.928 9.461,9.928 9.633,10.1 v1(9.7,10.1)
USB_P: U1.26 USB1.6 USB1.8 | length 25.7
  Top Layer w0.203: v1(6.2,10.7) 6.267,10.7 6.43,10.863 6.774,10.863 6.798,10.84 7.428,10.84 USB1.6 7.525,10.84 8.156,10.84 8.18,10.863 14.063,10.863 15.6,12.4 15.6,16.798 16.703,17.901 16.703,20.495 16.726,20.518 U1.26@16.726,20.828 ; USB1.8 7.525,9.84 8.156,9.84 8.18,9.864 8.506,9.864 8.797,9.573 9.461,9.573 9.633,9.4 v1(9.7,9.4)
  Bottom Layer w0.203: v1(6.2,10.7) 6.267,10.7 6.439,10.873 7.123,10.873 8.423,9.573 9.461,9.573 9.633,9.4 v1(9.7,9.4)
VBAT: C15.2 D2.2 J1.1 U4.3 | length 8
  Top Layer w0.5: J1.1 33.81,2.221 C15.2@33.81,6.2 ; C15.2 33.8,6.2 C15.2@33.81,6.2 ; U4.3 33.81,7.475 C15.2@33.81,6.2 ; D2.2 34.05,6.25 34,6.2 C15.2@33.81,6.2
pads on no net: E1.2 SW3.3 SW3.4 SW3.5 SW3.6 SW3.7 U1.6 U1.7 U1.8 U1.9 U1.10 U1.11 U1.13 U1.14 U1.15 U1.16 U1.17 U1.18 U1.19 U1.21 U1.22 U1.23 U1.24 U1.27 U1.28 U1.30 U1.31 U1.32 U1.33 U1.34 U1.35 U1.36 U1.37 U1.48 U1.49 U1.50 U1.51 U1.52 U2.4 U2.9 U2.10 U2.11 U2.12 U2.13 U2.14 U2.15 U3.1 U3.4 U3.7 U3.8 U3.12 U3.13 U3.14 U3.21 U3.22 U3.23 U3.24 U5.4 U6.4 USB1.3 USB1.9 USB1.13 USB1.14 Y1.2 Y1.4

## Polygon pours and split planes (outlines as drawn)
GND on Bottom Layer "GND_L04_P001" (solid, pour order 1): 0.1,33.5 6.5,33.5 6.5,39.9 49.9,39.9 49.9,0.1 0.1,0.1
GND on Inner Layer L2 "GND_L02_P002" (solid, pour order 2): 0.1,33.5 6.5,33.5 6.5,39.9 49.9,39.9 49.9,0.1 0.1,0.1
GND on Inner Layer L3 "GND_L03_P003" (solid, pour order 3): 0.1,33.5 6.5,33.5 6.5,39.9 49.9,39.9 49.9,0.1 0.1,0.1
GND on Top Layer "GND_L01_P000" (solid, pour order 0): 0.1,33.5 6.5,33.5 6.5,39.9 49.9,39.9 49.9,0.1 0.1,0.1

## Keep-outs
Keep-Out Layer:
  rectangle: 0,33.505 6.5,40.005

## Other copper
Top Layer:
  rectangle net LNA_IN: 11.5,26.853 11.906,27.147
  pour cut-out: 24.9,38.6 25.7,38.6 25.7,35.8 24.9,35.8
  pour cut-out: 6.9,21.2 7.1,21.2 7.1,18.4 6.9,18.4
  pour cut-out: 30.7,9 30.7,8.5 29.3,8.5 29.3,9
  pour cut-out: 20.897,5.153 26.8,5.153 26.8,0.104 26.796,0.1 20.956,0.1
  pour cut-out: 19.7,28.2 19.7,27.9 28.6,27.9 28.6,28.2

## Silkscreen, mask and mechanical layers (free items; w line width, h text height)
Top Overlay:
  lines w0.254: 39.5,7.7 48.7,7.7 48.7,9.5 39.5,9.5 39.5,7.7
  text "PWR" at 32,34.1 h1 r90
  text "DWM" at 31.423,24.965 h1 r90
  text "IO" at 1.216,20.012 h1
  text "RST" at 0.708,16.964 h1
  text "TA252601024" at 39.7,8 h0.8
  text "Batt" at 17.803,4.214 h0.8
  text "+" at 36.2,3.933 h1
Board:
  the board outline again, w0.1